# Altium PCB motor_connector.PcbDoc
Units mm, origin at the board's own origin, x right, y up, seen from the top; angles counter-clockwise.
Board outline 24 x 11.6 mm, 2 copper layers (Top Layer, Bottom Layer), stack 1.391 mm thick; 14 components, 12 nets, 24 pads, 0 vias.
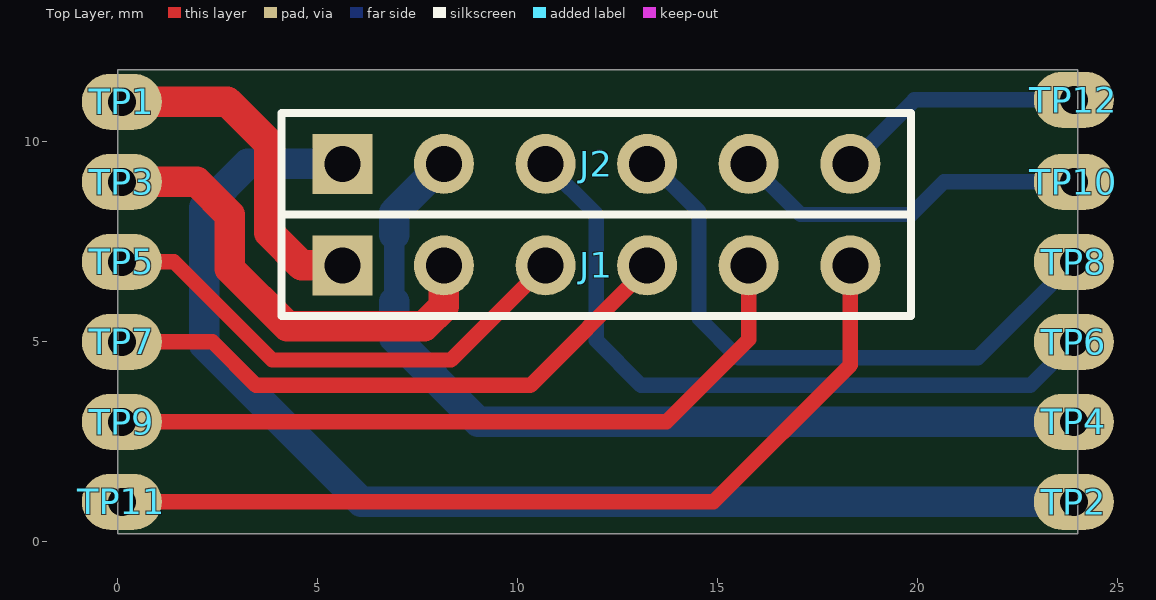
[diagram p0: Top Layer view]
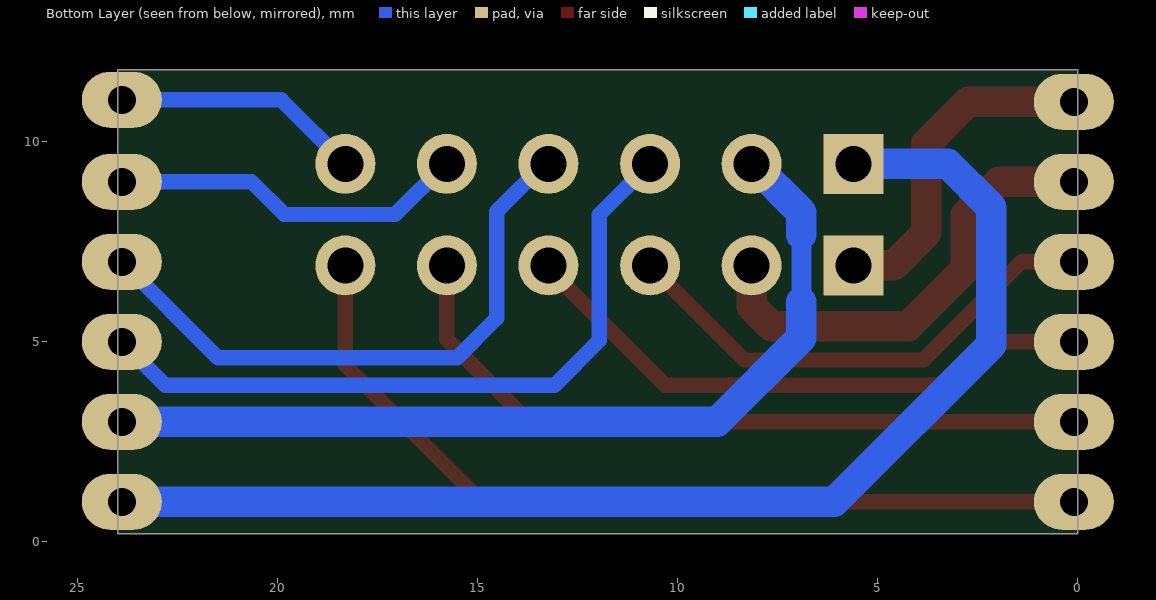
[diagram p1: Bottom Layer view, seen from below]

## Layer stack, top to bottom
Top Solder: solder mask 0.0102, Solder Resist, Dk 3.5
Top Layer: signal copper 0.0356
Dielectric 1: dielectric 1.32, FR-4, Dk 4.8
Bottom Layer: signal copper 0.0356
Bottom Solder: solder mask 0.0102, Solder Resist, Dk 3.5

## Board outline
0,0.2 0,11.8 24,11.8 24,0.2

## Design rules (kind name [scope] priority, off if disabled: settings)
Clearance All [All] p1: gap=0.178 ignorepadtopadclearanceinfootprint=FALSE except(0.127: Track-SMDPad SMDPad-SMDPad; 0.152: SMDPad-Region SMDPad-Hole Region-Region)
ComponentClearance J1_J2 [InComponent('J1') vs InComponent('J2')] p1: gap=0 collisioncheckmode=3 verticalgap=0 showdistances=FALSE
ComponentClearance [All] p2: gap=0.025 collisioncheckmode=3 verticalgap=0.025 showdistances=FALSE
Height [All] p1: minheight=0 maxheight=60 prefheight=12.7
HoleSize [All] p1: absolutevalues=TRUE maxlimit=4 minlimit=0.25 maxpercent=80.000 minpercent=20.000
HoleToHoleClearance [All] p1: gap=0.203 allowstackedmicrovias=TRUE
MinimumSolderMaskSliver [All] p1: minsoldermaskwidth=0
PlaneConnect [All] p1: planeconnectstyle=Direct reliefexpansion=0.508 reliefentries=4 reliefconductorwidth=0.254 reliefairgap=0.254
PolygonConnect GND [(ObjectKind = 'Pad') And (Net = 'GND')] p1: connectstyle=Direct reliefconductorwidth=0.254 reliefentries=4 polygonreliefangle="90 Angle" airgapwidth=0.254
PolygonConnect VIA [IsVia] p2: connectstyle=Direct reliefconductorwidth=0.254 reliefentries=4 polygonreliefangle="90 Angle" airgapwidth=0.254
PolygonConnect [All] p3: connectstyle=Relief reliefconductorwidth=0.254 reliefentries=4 polygonreliefangle="90 Angle" airgapwidth=0.254
RoutingVias [All] p1: holewidth=0.711 width=1.27 viastyle="Through Hole" minholewidth=0.3 minwidth=0.7 maxholewidth=0.711 maxwidth=1.27
SilkToSilkClearance [All] p1: silktosilkclearance=0.1
SilkToSolderMaskClearance [IsPad] p1: minsilkscreentomaskgap=0.003 clearancetoexposedcopper=TRUE
SolderMaskExpansion [All] p1: expansion=0.102 istentingtop=FALSE
Width [All] p1: maxlimit=5.08 minlimit=0.152 preferedwidth=0.254 minimp=50.000000 maximp=50.000000 favimp=50.000000
22 further rules are at their usual default settings.

## Classes and differential pairs
component class motor_connector: J1 J2 TP1 TP2 TP3 TP4 TP5 TP6 TP7 TP8 TP9 TP10 TP12

## Components (designator, comment, footprint, x,y, rotation, side; value= is the part's Value field where it differs from the comment)
J1 "Goldpin female straight" J_HEADER_1x6_2.54_VERTICAL 11.963,6.909 r0 top value=DS1023-1*6S21
J2 "Goldpin female straight" J_HEADER_1x6_2.54_VERTICAL 11.963,9.449 r0 top value=DS1023-1*6S21
TP1 "Single pin" TP_1PIN#1 0.381,10.922 r0 top
TP2 "Single pin" TP_1PIN#2 23.9,1 r0 top
TP3 "Single pin" TP_1PIN#2 0.1,9 r0 top
TP4 "Single pin" TP_1PIN#3 23.9,4.318 r0 top
TP5 "Single pin" TP_1PIN#2 0.1,7 r0 top
TP6 "Single pin" TP_1PIN#4 23.9,6.223 r0 top
TP7 "Single pin" TP_1PIN#2 0.1,5 r0 top
TP8 "Single pin" TP_1PIN#5 23.9,8.001 r0 top
TP9 "Single pin" TP_1PIN#2 0.1,3 r0 top
TP10 "Single pin" TP_1PIN#6 23.9,9.398 r90 top
TP11 "Single pin" TP_1PIN#7 0.508,1.397 r90 top
TP12 "Single pin" TP_1PIN#8 23.9,11.049 r90 top

## Footprints (in the part's own frame and the unit in brackets; to place one, negate y for a bottom-side part, rotate by r counter-clockwise, add the part's x,y. Pads: shape width x height; smd on the part's side, far side on the other; paste and mask are expansions set on the pad)
J_HEADER_1x6_2.54_VERTICAL [mm] "Connector; Header; 6 Position; Male-Female"
  rect 1.5x1.5 hole 0.9: 1(-6.35,0)
  round 1.5 hole 0.9: 2(-3.81,0) 3(-1.27,0) 4(1.27,0) 5(3.81,0) 6(6.35,0)
  silkscreen extent -7.87,-1.27 7.87,1.27, body extent -7.87,-1.27 7.87,1.27, height 8.5
TP_1PIN#1 [mm] "Testpoint; 1 Pin;"
  oval 2x1.4 hole 0.7: 1(-0.281,0.078)
TP_1PIN#2 [mm] "Testpoint; 1 Pin;"
  oval 2x1.4 hole 0.7: 1(0,0)
TP_1PIN#3 [mm] "Testpoint; 1 Pin;"
  oval 2x1.4 hole 0.7: 1(0,-1.318)
TP_1PIN#4 [mm] "Testpoint; 1 Pin;"
  oval 2x1.4 hole 0.7: 1(0,-1.223)
TP_1PIN#5 [mm] "Testpoint; 1 Pin;"
  oval 2x1.4 hole 0.7: 1(0,-1.001)
TP_1PIN#6 [mm] "Testpoint; 1 Pin;"
  oval 1.4x2 hole 0.7: 1(-0.398,0)
TP_1PIN#7 [mm] "Testpoint; 1 Pin;"
  oval 1.4x2 hole 0.7: 1(-0.397,0.408)
TP_1PIN#8 [mm] "Testpoint; 1 Pin;"
  oval 1.4x2 hole 0.7: 1(0,0)

## Part data
J1 J2: library part J_HEADER_1x6_2.54_VERTICAL, "Pin Header", Manufacturer=Connfly, Manufacturer Part Number=DS1023-1*6S21, Supplier Part Number 1=ZL262-6SG, HelpURL=https://www.tme.eu/Document/584b1a60cf2e8809a936c5f5ff2de0d5/zl262-sg.pdf, Part Number=J_HEADER_1x6_2.54_VERTICAL, SCH_Footprint="1x6 2.54mm Vertical", Supplier 1=TME, Supplier 2="RS Components", Supplier 3=Farnell, Supplier 4=Mouser, Supplier 5=Digi-Key, Supplier 6=LCSC
TP1 TP2 TP3 TP4 TP5 TP6 TP7 TP8 TP9 TP10 TP11 TP12: library part TP_1PIN, "Testpoint", Part Number=TP_1PIN, SCH_Footprint=Single, Supplier 1=TME, Supplier 2="RS Components", Supplier 3=Farnell, Supplier 4=Mouser, Supplier 5=Digi-Key, Supplier 6=LCSC

## Nets (pads, with @x,y where several pads share a name; then routed paths per layer and width w, separated by ;. In a path a pad name is that pad's centre, name@x,y a point inside that pad or via, vN(x,y) a via of type N, cw(c..) or ccw(c..) an arc to the next point about the centre after c; other vN are vias at no path point)
L_FB1: J1.4 TP7.1 | length 14.9
  Top Layer w0.381: TP7.1 2.366,5 3.454,3.912 10.312,3.912 13.183,6.782 J1.4@13.183,6.934
L_FB2: J1.5 TP9.1 | length 18.4
  Top Layer w0.381: TP9.1 13.719,3 15.773,5.055 J1.5@15.773,6.883
L_GND: J1.6 TP11.1 | length 22.2
  Top Layer w0.381: TP11.1 14.894,1 18.313,4.42 J1.6@18.313,6.96
L_M1: J1.1 TP1.1 | length 8.5
  Top Layer w0.762: TP1.1 2.741,11 3.785,9.957 3.785,7.722 4.597,6.909 J1.1
L_M2: J1.2 TP3.1 | length 11.6
  Top Layer w0.762: TP3.1 1.973,9 2.803,8.17 2.803,6.824 4.242,5.385 7.656,5.385 8.153,5.882 J1.2
L_V: J1.3 TP5.1 | length 12.6
  Top Layer w0.381: TP5.1 1.407,7 3.861,4.547 8.331,4.547 J1.3
R_FB1: J2.4 TP8.1 | length 15.2
  Bottom Layer w0.381: J2.4@13.284,9.5 14.529,8.255 14.529,5.588 15.519,4.597 21.497,4.597 TP8.1
R_FB2: J2.5 TP10.1 | length 9
  Bottom Layer w0.381: J2.5@15.773,9.474 17.067,8.181 19.837,8.181 20.656,9 TP10.1
R_GND: J2.6 TP12.1 | length 6.3
  Bottom Layer w0.381: J2.6@18.263,9.398 19.914,11.049 TP12.1
R_M1: J2.1 TP2.1 | length 30.7
  Bottom Layer w0.762: J2.1@5.639,9.449 3.251,9.449 2.159,8.357 2.159,4.928 6.087,1 TP2.1
R_M2: J2.2 TP4.1 | length 22.7
  Bottom Layer w0.508: 6.909,5.994 6.909,7.671
  Bottom Layer w0.762: 6.909,5.994 6.909,5.105 9.014,3 TP4.1 ; 6.909,7.671 6.909,8.23 J2.2@8.128,9.449
R_V: J2.3 TP6.1 | length 17.8
  Bottom Layer w0.381: J2.3@10.668,9.474 J2.3 11.963,8.179 11.963,5.029 13.081,3.912 22.812,3.912 TP6.1

## Silkscreen, mask and mechanical layers (free items; w line width, h text height)
Mechanical 1:
  region: -1.651,7.112
  lines w0.152: 0,0.2 24,0.2 24,11.8 0,11.8 0,0.2